# Altium PCB BLDC_Controller_PCB.PcbDoc
Units mm, origin at the board's own origin, x right, y up, seen from the top; angles counter-clockwise.
Board outline 152.4 x 101.6 mm, 2 copper layers (Top Layer, Bottom Layer); 112 components, 63 nets, 275 pads, 7 vias.
Unrouted connection lines stored in the file: 81.
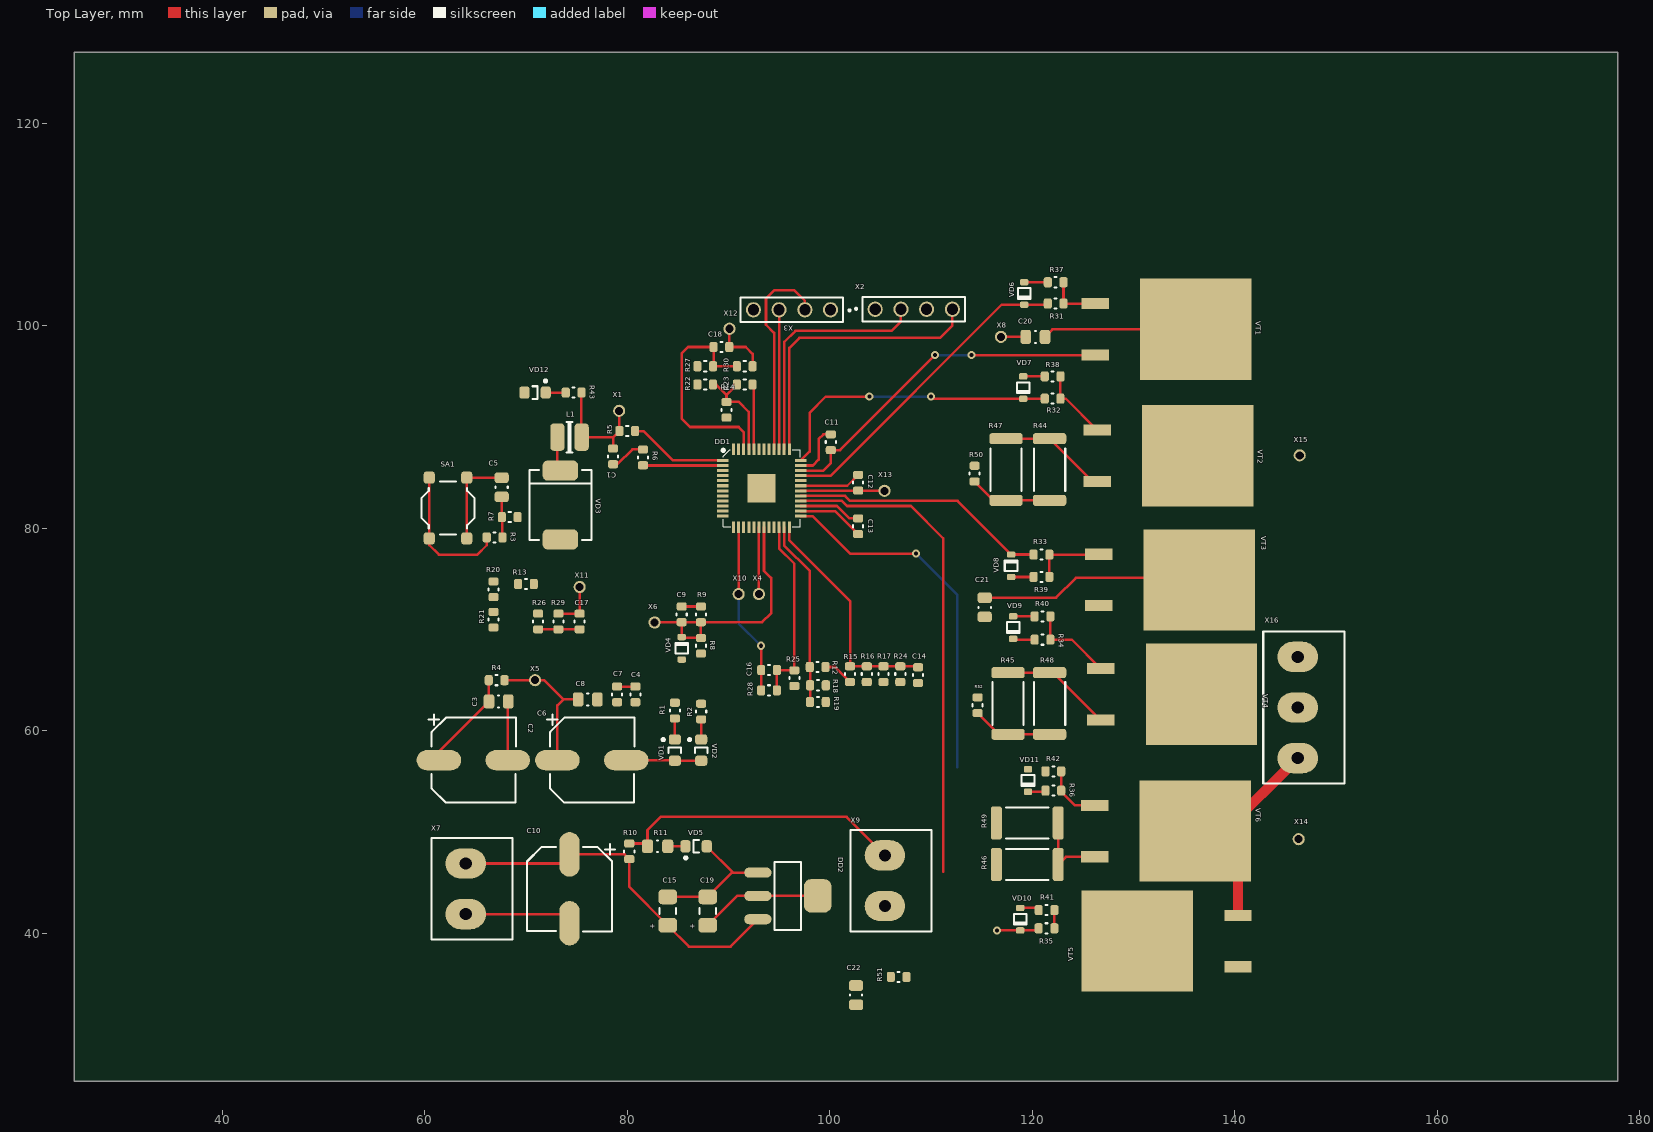
[diagram p0: Top Layer view]
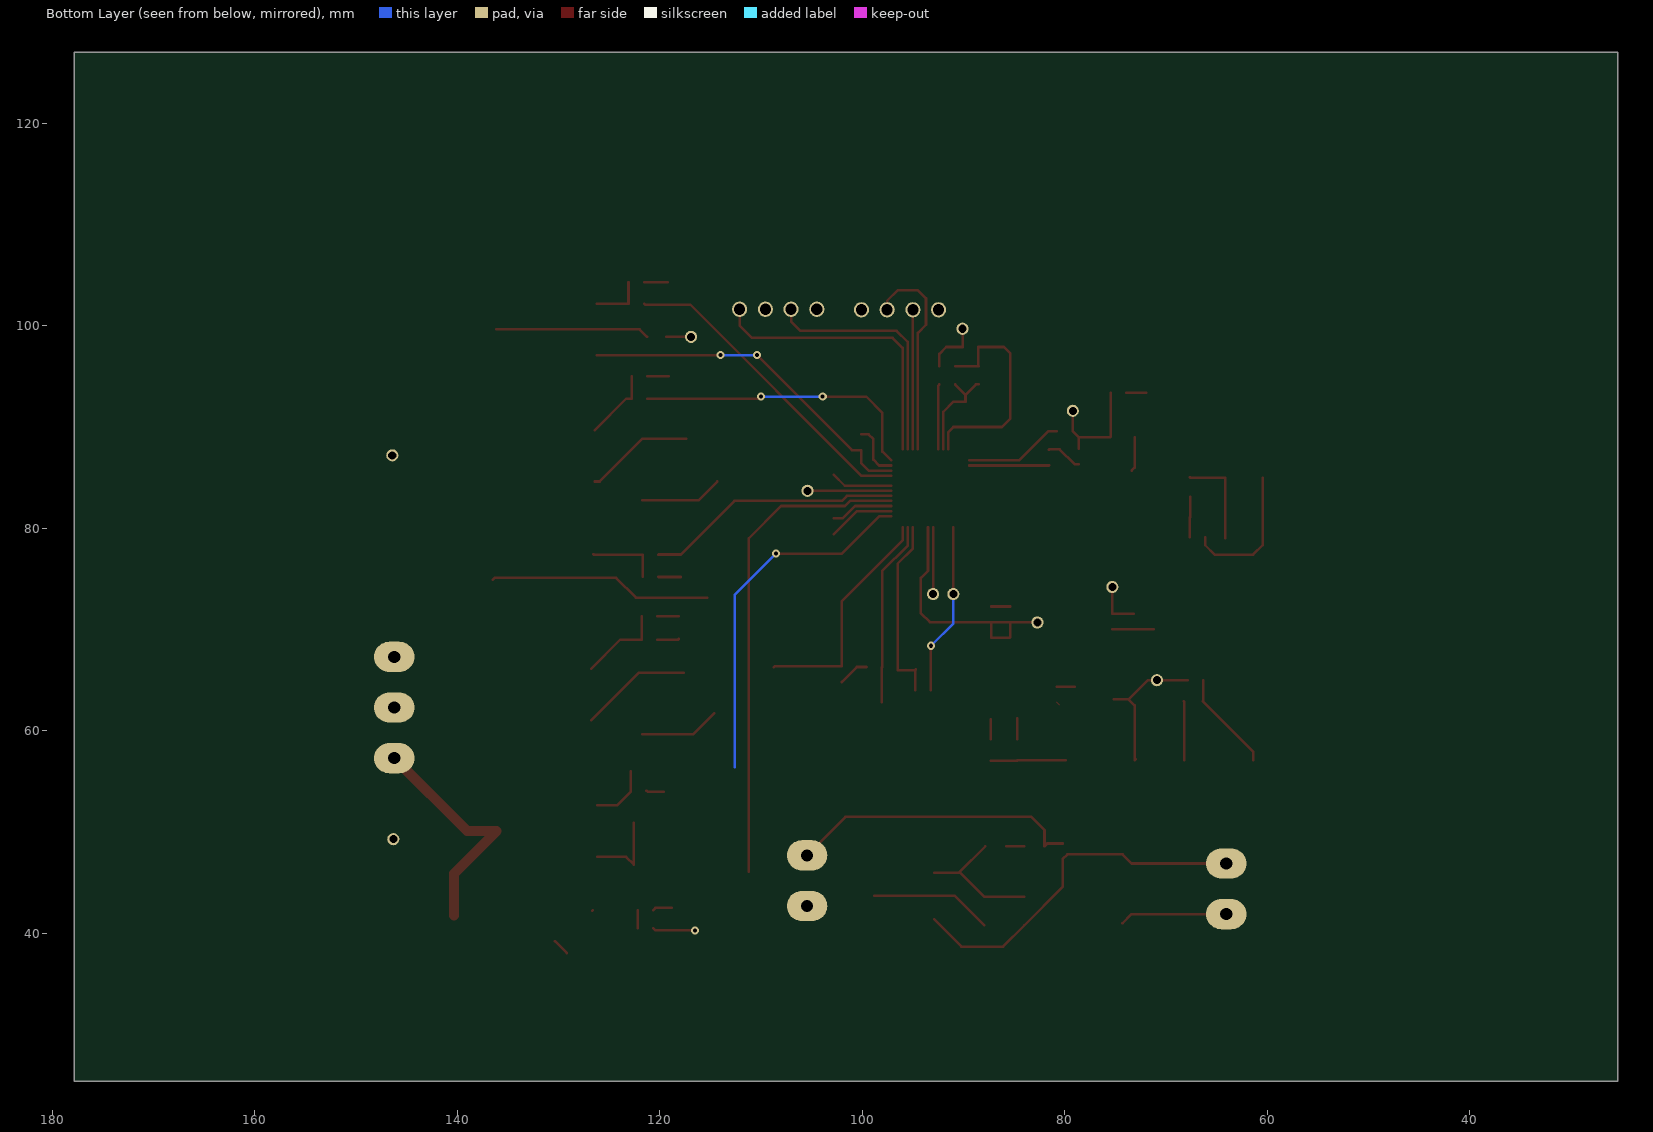
[diagram p1: Bottom Layer view, seen from below]

## Layer stack, top to bottom
Top Solder: solder mask 0.0102, Solder Resist, Dk 3.5
Top Layer: signal copper 0.0356
Dielectric 1: dielectric 0.32, FR-4, Dk 4.8
Bottom Layer: signal copper 0.0356
Bottom Solder: solder mask 0.0102, Solder Resist, Dk 3.5

## Board outline
25.4,25.4 177.8,25.4 177.8,127 25.4,127

## Design rules (kind name [scope] priority, off if disabled: settings)
Clearance [All] p1: gap=0 ignorepadtopadclearanceinfootprint=TRUE
PolygonConnect [All] p1: connectstyle=Relief reliefconductorwidth=0.254 reliefentries=4 polygonreliefangle="90 Angle" airgapwidth=0.254
RoutingVias [All] p1: holewidth=0.4 width=0.8 viastyle="Through Hole" minholewidth=0.4 minwidth=0.8 maxholewidth=0.4 maxwidth=0.8
SolderMaskExpansion [All] p1: expansion=0.102
Width [All] p1: maxlimit=1 minlimit=0.25 preferedwidth=0.26
30 further rules are at their usual default settings.

## Components (designator, comment, footprint, x,y, rotation, side; value= is the part's Value field where it differs from the comment)
C1 "Cap EIA 0603" "CAP EIA 0603" 78.6,87.1 r90 top value=47uF
C2 "Cap El SMT Case F" "CAP EL CASE F" 64.8,57.1 r90 top value=22uF
C3 "Cap EIA 0805" "CAP EIA 0805" 67.3,62.9 r180 top value=220nF
C4 "Cap EIA 0603" "CAP EIA 0603" 80.8,63.6 r90 top value=100nF
C5 "Cap EIA 0805" "CAP EIA 0805" 67.6,84.05 r270 top value=3.3nF
C6 "Cap El SMT Case F" "CAP EL CASE F" 76.5,57.1 r90 top value=10uF
C7 "Cap EIA 0603" "CAP EIA 0603" 79,63.6 r90 top value=100nF
C8 "Cap EIA 0805" "CAP EIA 0805" 76.1,63.1 r0 top value=100nF
C9 "Cap EIA 0603" "CAP EIA 0603" 85.375,71.5 r270 top
C10 "Cap El SMT Case F" "CAP EL CASE F" 74.3,44.4 r0 top value=220uF
C11 "Cap EIA 0603" "CAP EIA 0603" 100.1,88.5 r270 top value=100nF
C12 "Cap EIA 0603" "CAP EIA 0603" 102.8,84.5 r270 top value=100nF
C13 "Cap EIA 0603" "CAP EIA 0603" 102.8,80.2 r270 top value=100nF
C14 "Cap EIA 0603" "CAP EIA 0603" 108.717,65.5 r90 top value=1nF
C15 "Cap El Case A (Tantalum)" "CAP CASE A" 84,42.2 r90 top value=10uF
C16 "Cap EIA 0603" "CAP EIA 0603" 94,66 r180 top
C17 "Cap EIA 0603" "CAP EIA 0603" 75.3,70.8 r90 top
C18 "Cap EIA 0603" "CAP EIA 0603" 89.3,97.9 r0 top
C19 "Cap El Case A (Tantalum)" "CAP CASE A" 87.941,42.2 r90 top value=10uF
C20 "Cap EIA 0805" "CAP EIA 0805" 120.3,98.9 r0 top value=220nF
C21 "Cap EIA 0805" "CAP EIA 0805" 115.3,72.2 r90 top value=220nF
C22 "Cap EIA 0805" "CAP EIA 0805" 102.6,33.9 r90 top value=220nF
DD1 "STSPIN32F0" "VFQFPN48 7 x 7 x 1.0 - 48L" 93.35,83.7 r0 top value="Микросхема управления бесколлекторным эл.двиг."
DD2 "LM1117S50" SOT-223_M 95.85,43.7 r270 top value="Регулятор напряжения LDO 800mA"
L1 "22uH" SRN3015 74.3,89 r180 top value="Дроссель - Ток:  А; Ток насыщения:  А; Индуктивность:  мкГн; Допуск: ±%;"
R1 "Res EIA 0603" "RES EIA 0603" 84.7,62 r270 top value=120
R2 "Res EIA 0603" "RES EIA 0603" 87.3,61.9 r270 top value=120
R3 "Res EIA 0603" "RES EIA 0603" 66.9,79.1 r0 top value=100
R4 "Res EIA 0603" "RES EIA 0603" 67.1,65 r0 top value=0
R5 "Res EIA 0603" "RES EIA 0603" 80,89.6 r0 top value=0
R6 "Res EIA 0603" "RES EIA 0603" 81.554,87 r270 top value=0
R7 "Res EIA 0603" "RES EIA 0603" 68.4,81.1 r0 top value=39k
R8 "Res EIA 0603" "RES EIA 0603" 87.275,68.4 r270 top value=2.2k
R9 "Res EIA 0603" "RES EIA 0603" 87.275,71.5 r270 top value=2.2k
R10 "Res EIA 0603" "RES EIA 0603" 80.2,48.1 r90 top value=0
R11 "Res EIA 0805" "RES EIA 0805" 83,48.6 r180 top value=2.1k
R12 "Res EIA 0603" "RES EIA 0603" 98.8,66.3 r180 top value=1.78k
R13 "Res EIA 0603" "RES EIA 0603" 70,74.5 r180 top value=1.78k
R14 "Res EIA 0603" "RES EIA 0603" 89.8,91.7 r90 top value=1.78k
R15 "Res EIA 0603" "RES EIA 0603" 102,65.6 r90 top value=2.2k
R16 "Res EIA 0603" "RES EIA 0603" 103.654,65.6 r90 top value=2.2k
R17 "Res EIA 0603" "RES EIA 0603" 105.309,65.6 r90 top value=2.2k
R18 "Res EIA 0603" "RES EIA 0603" 98.829,64.5 r0 top value=27.4k
R19 "Res EIA 0603" "RES EIA 0603" 98.829,62.846 r180 top value=27.4k
R20 "Res EIA 0603" "RES EIA 0603" 66.8,73.975 r90 top value=27.4k
R21 "Res EIA 0603" "RES EIA 0603" 66.8,70.971 r90 top value=27.4k
R22 "Res EIA 0603" "RES EIA 0603" 87.7,94.2 r180 top value=27.4k
R23 "Res EIA 0603" "RES EIA 0603" 91.6,94.2 r180 top value=27.4k
R24 "Res EIA 0603" "RES EIA 0603" 106.963,65.6 r270 top value=75k
R25 "Res EIA 0603" "RES EIA 0603" 96.5,65.2 r90 top value=1.78k
R26 "Res EIA 0603" "RES EIA 0603" 71.2,70.8 r270 top value=1.78k
R27 "Res EIA 0603" "RES EIA 0603" 87.7,96 r0 top value=1.78k
R28 "Res EIA 0603" "RES EIA 0603" 94,64 r180 top value=13.7k
R29 "Res EIA 0603" "RES EIA 0603" 73.2,70.8 r90 top value=13.7k
R30 "Res EIA 0603" "RES EIA 0603" 91.6,96 r0 top value=13.7k
R31 "Res EIA 0603" "RES EIA 0603" 122.3,102.19 r0 top value=62
R32 "Res EIA 0603" "RES EIA 0603" 122,92.8 r0 top value=62
R33 "Res EIA 0603" "RES EIA 0603" 120.9,77.4 r0 top value=62
R34 "Res EIA 0603" "RES EIA 0603" 121,69 r0 top value=62
R35 "Res EIA 0603" "RES EIA 0603" 121.4,40.5 r0 top value=62
R36 "Res EIA 0603" "RES EIA 0603" 122.075,54.1 r0 top value=62
R37 "Res EIA 0603" "RES EIA 0603" 122.3,104.29 r0 top value=10
R38 "Res EIA 0603" "RES EIA 0603" 122,95 r0 top value=10
R39 "Res EIA 0603" "RES EIA 0603" 120.9,75.2 r0 top value=10
R40 "Res EIA 0603" "RES EIA 0603" 121,71.3 r0 top value=10
R41 "Res EIA 0603" "RES EIA 0603" 121.4,42.3 r0 top value=10
R42 "Res EIA 0603" "RES EIA 0603" 122.075,56 r0 top value=10
R43 "Res EIA 0603" "RES EIA 0603" 74.7,93.4 r180 top value=330
R44 "Res EIA 2512" "RES EIA 2512" 121.7,85.8 r90 top value=0.02
R45 "Res EIA 2512" "RES EIA 2512" 117.6,62.7 r90 top value=0.02
R46 "Res EIA 2512" "RES EIA 2512" 119.5,46.8 r0 top value=0.02
R47 "Res EIA 2512" "RES EIA 2512" 117.4,85.8 r270 top value=0.02
R48 "Res EIA 2512" "RES EIA 2512" 121.7,62.7 r270 top value=0.02
R49 "Res EIA 2512" "RES EIA 2512" 119.5,50.9 r180 top value=0.02
R50 "Res EIA 0603" "RES EIA 0603" 114.3,85.4 r270 top value=0
R51 "Res EIA 0603" "RES EIA 0603" 106.8,35.7 r0 top value=0
R52 "Res EIA 0603" "RES EIA 0603" 114.6,62.525 r270 top value=0
SA1 "IT-1187" IT-1187 62.3,82 r90 top value="Тактовые кнопки  4х4 мм. SMD h=1,5 мм."
VD1 "KP-2012xxxx" "SMD LED 0805 (GREEN)" 84.7,58.1 r270 top value="Светодиод общего назначения - Цвет: Красный; N: 1; ?1:  645 нм; Iv1: 80 мкд; U: 2.6 В;"
VD2 "KP-2012xxxx" "SMD LED 0805 (GREEN)" 87.3,58.1 r270 top value="Светодиод общего назначения - Цвет: Красный; N: 1; ?1:  645 нм; Iv1: 80 мкд; U: 2.6 В;"
VD3 "SMCJ5.0A" DO-214AB 73.4,82.3 r270 top value="TVS Диод, однонаправленный, Uраб. = 5В, Uпроб. = 6,74В, P = 1500 Вт"
VD4 "BAT54HT1G" SOD-323 85.375,68.146 r270 top value="SCHOTTKY BARRIER DIOD 0.2 AMPERES, 30 VOLTS"
VD5 "KP-2012xxxx" "SMD LED 0805 (GREEN)" 86.8,48.6 r0 top value="Светодиод общего назначения - Цвет: Красный; N: 1; ?1:  645 нм; Iv1: 80 мкд; U: 2.6 В;"
VD6 "4148WS" SOD-323 119.2,103.19 r90 top value="150mA, 100V, SOD-323"
VD7 "4148WS" SOD-323 119.1,93.89 r90 top value="150mA, 100V, SOD-323"
VD8 "4148WS" SOD-323 117.9,76.3 r270 top value="150mA, 100V, SOD-323"
VD9 "4148WS" SOD-323 118.1,70.2 r90 top value="150mA, 100V, SOD-323"
VD10 "4148WS" SOD-323 118.8,41.4 r90 top value="150mA, 100V, SOD-323"
VD11 "4148WS" SOD-323 119.575,55.1 r90 top value="150mA, 100V, SOD-323"
VD12 "KP-2012xxxx" "SMD LED 0805 (GREEN)" 70.9,93.4 r180 top value="Светодиод общего назначения - Цвет: Красный; N: 1; ?1:  645 нм; Iv1: 80 мкд; U: 2.6 В;"
VT1 "IRLZ44NS" D2PAK_M 133.05,99.64 r0 top value="MOSFET силовой транзистор - Тип: N; Uси: 50 В; Rси(вкл): 0.35...0.25 Ом; Iси: 40А;"
VT2 "IRLZ44NS" D2PAK_M 133.25,87.16 r0 top value="MOSFET силовой транзистор - Тип: N; Uси: 50 В; Rси(вкл): 0.35...0.25 Ом; Iси: 40А;"
VT3 "IRLZ44NS" D2PAK_M 133.4,74.9 r0 top value="MOSFET силовой транзистор - Тип: N; Uси: 50 В; Rси(вкл): 0.35...0.25 Ом; Iси: 40А;"
VT4 "IRLZ44NS" D2PAK_M 133.6,63.6 r0 top value="MOSFET силовой транзистор - Тип: N; Uси: 50 В; Rси(вкл): 0.35...0.25 Ом; Iси: 40А;"
VT5 "IRLZ44NS" D2PAK_M 133.45,39.24 r180 top value="MOSFET силовой транзистор - Тип: N; Uси: 50 В; Rси(вкл): 0.35...0.25 Ом; Iси: 40А;"
VT6 "IRLZ44NS" D2PAK_M 133,50.1 r0 top value="MOSFET силовой транзистор - Тип: N; Uси: 50 В; Rси(вкл): 0.35...0.25 Ом; Iси: 40А;"
X1 "Pin" Pin 79.2,91.6 r90 top value="Generic Pin Contact"
X2 "ST-Link" SWD 108.257,101.6 r0 top value="Вилка штыревая 2.54мм 1x4 прям"
X3 "PLS-4" SWD 96.3,101.6 r180 top value="Разъем штыревой четырехконтактный"
X4 "Pin" Pin 93,73.5 r90 top value="Generic Pin Contact"
X5 "Pin" Pin 70.9,65 r90 top value="Generic Pin Contact"
X6 "Pin" Pin 82.7,70.7 r270 top value="Generic Pin Contact"
X7 "TB2" TB2 63.9,44.4 r90 top
X8 "Pin" Pin 116.9,98.9 r90 top value="Generic Pin Contact"
X9 "TB2" TB2 105.3,45.2 r90 top
X10 "Pin" Pin 91,73.5 r90 top value="Generic Pin Contact"
X11 "Pin" Pin 75.3,74.2 r90 top value="Generic Pin Contact"
X12 "Pin" Pin 90.1,99.7 r90 top value="Generic Pin Contact"
X13 "Pin" Pin 105.4,83.7 r90 top value="Generic Pin Contact"
X14 "Pin" Pin 146.3,49.3 r90 top value="Generic Pin Contact"
X15 "Pin" Pin 146.4,87.2 r90 top value="Generic Pin Contact"
X16 "TB3" TB3 146.05,59.8 r90 top

## Footprints (in the part's own frame and the unit in brackets; to place one, negate y for a bottom-side part, rotate by r counter-clockwise, add the part's x,y. Pads: shape width x height; smd on the part's side, far side on the other; paste and mask are expansions set on the pad)
"CAP CASE A" [mm] "Chip Capacitor, 2-Leads, Body 3.20x1.60mm, IPC Medium Density"
  rrect50% 1.45x1.85 smd: 1(-1.4,0) 2(1.4,0)
  silkscreen extent -0.3,-0.82 0.3,0.83, body extent -1.7,-0.8 1.7,0.8, height 1.64
"CAP EIA 0603" [mm] "Chip Resistor, 2-Leads, Body 1.57x0.85mm, IPC Medium Density"
  rrect50% 0.8x1 smd: 1(-0.775,0) 2(0.775,0)
  silkscreen extent -0.1,-0.5 0.1,0.5, body extent -0.8,-0.4 0.8,0.4, height 0.3
"CAP EIA 0805" [mm] "Chip Capacitor, 2-Leads, Body 2.00x1.25mm, IPC Medium Density"
  rrect50% 1.05x1.4 smd: 1(-0.95,0) 2(0.95,0)
  silkscreen extent -0.05,-0.6 0.05,0.6, body extent -1,-0.62 1,0.62, height 0.78
"CAP EL CASE F" [mm] "SMT Type 8.0x10.5 mm"
  oval 2x4.4 smd: 1(0,3.4) 2(0,-3.4)
  silkscreen extent -4.2,-4.2 4.5,4.4, body extent -4.15,-4.95 4.15,4.95, height 10.2
D2PAK_M [mm] "D2-PAK, 4-Leads, Body 8.8x10.4mm, Pitch 2.54mm, Lead Span 15.1mm, IPC Low Density"
  rect 2.7x1.1 smd: 1(-6.85,2.54) 3(-6.85,-2.54)
  rect 11x10 smd: 2(3.1,0)
  body extent -7.72,-5.08 7.55,5.08, height 4.98
DO-214AB [mm] "SMT Diod DO-214AB case (SMC)"
  rrect50% 2x3.5 smd: 1(-3.4,0) 2(3.4,0)
  silkscreen extent -3.45,-3.05 3.45,3.05, body extent -4.06,-3.05 4.07,3.05, height 2.4
IT-1187 [mm]
  rrect50% 1.2x1.1 smd: 1(-3,-1.85) 1(3,-1.85) 2(-3,1.85) 2(3,1.85)
  silkscreen extent -2.6,-2.6 2.6,2.6, body extent -3.2,-2.6 3.2,2.6, height 1.5
Pin [mm]
  round 1.2 hole 0.8: 1(0,0)
"RES EIA 0603" [mm] "Chip Resistor, 2-Leads, Body 1.57x0.85mm, IPC Medium Density"
  rrect50% 0.8x1 smd: 1(-0.775,0) 2(0.775,0)
  silkscreen extent -0.1,-0.5 0.1,0.5, body extent -0.8,-0.4 0.8,0.4, height 0.3
"RES EIA 0805" [mm] "Chip Resistor, 2-Leads, Body 2.10x1.30mm, IPC Medium Density"
  rrect50% 1.1x1.35 smd: 1(-1,0) 2(1,0)
  silkscreen extent -0.05,-0.58 0.05,0.58, body extent -1,-0.62 1,0.62, height 0.78
"RES EIA 2512" [mm] "Chip Resistor, 2-Leads, Body 6.35x3.10mm, IPC Medium Density"
  rrect50% 1.1x3.3 smd: 1(-3.05,0) 2(3.05,0)
  silkscreen extent -2.1,-1.55 2.1,1.55, body extent -3.18,-1.5 3.18,1.5, height 1.6
"SMD LED 0805 (GREEN)" [mm]
  rrect50% 1x1.2 smd: 1(-1.05,0) 2(1.05,0)
  silkscreen extent -1.15,-1.27 0.28,0.63, body extent -1.01,-0.62 1.01,0.63, height 1.1
SOD-323 [mm] "Diod"
  rrect50% 0.63x0.83 smd: 1(-1.11,0) 2(1.11,0)
  silkscreen extent -0.53,-0.63 0.52,0.63, body extent -1.3,-0.67 1.3,0.68, height 1.1
SOT-223_M [mm] "SOT223, 4-Leads, Body 6.5x3.5mm, Pitch 2.3mm, Lead Span 7mm, IPC Low Density"
  oval 1x2.7 smd: 1(-2.3,-2.95) 2(0,-2.95) 3(2.3,-2.95)
  rrect50% 3.3x2.7 smd: 4(0,2.95)
  silkscreen extent -3.35,-1.3 3.35,1.3, body extent -3.25,-3.49 3.25,3.4, height 1.7
SRN3015 [mm] "SRN3015 Series - Semi-shielded Power Inductors"
  rrect50% 1.4x2.7 smd: 1(-1.2,0) 2(1.2,0)
  silkscreen extent -0.3,-1.5 0.3,1.5, body extent -1.51,-1.36 1.51,1.36, height 1.5
SWD [mm]
  round 1.5 hole 1.1: 1(-3.775,0.025) 2(-1.235,0.025) 3(1.305,0.025) 4(3.845,0.025)
  silkscreen extent -5.75,-1.2 5.1,1.25, body extent -5.11,-1.2 5.04,1.34, height 8.54
TB2 [mm]
  oval 3x4 hole 1.2: 1(2.5,-0.15) 2(-2.5,-0.15)
  silkscreen extent -5,-4.75 5,3.25, body extent -5,-4.75 5,3.25, height 10
TB3 [mm]
  oval 3x4 hole 1.2: 1(7.5,-0.15) 2(2.5,-0.15) 3(-2.5,-0.15)
  silkscreen extent -5,-4.75 10,3.25, body extent -5,-4.75 10,3.25, height 10
"VFQFPN48 7 x 7 x 1.0 - 48L" [mm]
  rect 1.1x0.3 smd: 1(-3.925,3) 2(-3.925,2.5) 3(-3.925,2) 4(-3.925,1.5) 5(-3.925,1) 6(-3.925,0.5) 7(-3.925,0) 8(-3.925,-0.5) 9(-3.925,-1) 10(-3.925,-1.5) 11(-3.925,-2) 12(-3.925,-2.5) 25(3.775,-2.5) 26(3.775,-2) 27(3.775,-1.5) 28(3.775,-1) 29(3.775,-0.5) 30(3.775,0) 31(3.775,0.5) 32(3.775,1) 33(3.775,1.5) 34(3.775,2) 35(3.775,2.5) 36(3.775,3)
  rect 0.3x1.1 smd: 13(-2.85,-3.6) 14(-2.35,-3.6) 15(-1.85,-3.6) 16(-1.35,-3.6) 17(-0.85,-3.6) 18(-0.35,-3.6) 19(0.15,-3.6) 20(0.65,-3.6) 21(1.15,-3.6) 22(1.65,-3.6) 23(2.15,-3.6) 24(2.65,-3.6) 37(2.65,4.1) 38(2.15,4.1) 39(1.65,4.1) 40(1.15,4.1) 41(0.65,4.1) 42(0.15,4.1) 43(-0.35,4.1) 44(-0.85,4.1) 45(-1.35,4.1) 46(-1.85,4.1) 47(-2.35,4.1) 48(-2.85,4.1)
  rect 2.8x2.8 smd: 49(-0.1,0.25)
  silkscreen extent -4,-3.55 3.72,4.12, body extent -4.08,-3.72 3.88,4.23, height 0.75

## Part data
C2 C6 C10: "8.0x10.5 mm Surface Mount Aluminum Electrolytic Capacitor", Group=Конденсаторы
DD1: "Микросхема управления бесколлекторным эл.двигателем", Manufacture=ST, Group=Микросхемы, Information=https://www.st.com/resource/en/datasheet/stspin32f0.pdf, Name=STSPIN32F0, Supplier="Магазин: hkhonbo Store"
DD2: "LDO Voltage Regulator", Manufacturer="ST Microelectronics", Group=Микросхемы, Name=LM1117S50, Supplier="ООО \"Торгэлектроника\""
L1: library part SRN3015, "Semi-shielded Power Inductors", Manufacturer=Bourns, Group=Индуктивности, Name=SRN3015-xxxx, Supplier=Компэл
SA1: "Тактовая кнопка", Manufacturer="Switronic Industrial Corp.", Group=Переключатели, Name=IT-1187, Supplier="ООО\"Торгэлектроника\""
VD1 VD2 VD5 VD12: library part FYLS-0805xxxx, "SMD Led", Manufacture="Foryard (FORYARD)", Group=Диоды, Name=KP-2012xxxx, Supplier="ООО \"Компэл\""
VD3: "TVS Диод, двунаправленный, Uраб. = 5В, Uпроб. = 6,74В, P = 1500 Вт", Manufacture="ST Microelectronics (ST)", Group=Диоды, Name=SMCJ5.0A, Supplier="ООО \"Компэл\""
VD4: "SCHOTTKY BARRIER DIOD 0.2 AMPERES, 30 VOLTS", Manufacture="ON Semiconductor", Group=Диоды, Name=BAT54HT1G, Supplier="ООО \"Компэл\""
VD6 VD7 VD8 VD9 VD10 VD11: "Diod, 150mA, 100V(SOD-323)", Manufacture="Diodes Incorporated", Group=Диоды, Name=1N4148WS, Supplier="Магазин: CHANZON Official Store"
VT1 VT2 VT3 VT4 VT5 VT6: "HEXFET Power MOSFET", Manufacturer="International Rectifier", Group=Транзисторы, Name=IRLZ44NSPBF, Supplier="ООО \"Торгэлектроника\""
X1 X4 X5 X6 X8 X10 X11 X12 X13 X14 X15: "Generic Pin Contact", Manufacturer=-, Group=-, Name=-, Supplier=-
X2: library part "SWD(PLS- 4)", Manufacturer=Тайвань(Китай), Group=Разъемы, Name="PLS- 4", Supplier="ООО\"Торгэлектроника\""
X3: Manufacturer="Hsuan Mao(Китай)", Group=Разъемы, Name=PLS-4, Supplier="ООО\"Торгэлектроника\""
C1 C3 C4 C5 C7 C8 C9 C11 C12 C13 C14 C15 C16 C17 C18 C19 C20 C21 C22: Group=Конденсаторы
R1 R2 R3 R4 R5 R6 R7 R8 R9 R10 R11 R12 R13 R14 R15 R16 R17 R18 R19 R20 R21 R22 R23 R24 R25 R26 R27 R28 R29 R30 R31 R32 R33 R34 R35 R36 R37 R38 R39 R40 R41 R42 R43 R44 R45 R46 R47 R48 R49 R50 R51 R52: Group=Резисторы
X7 X9 X16: Group=Разъемы

## Via types
v1: diameter 0.8, hole 0.4, Top Layer to Bottom Layer, 7 vias

## Nets (pads, with @x,y where several pads share a name; then routed paths per layer and width w, separated by ;. In a path a pad name is that pad's centre, name@x,y a point inside that pad or via, vN(x,y) a via of type N, cw(c..) or ccw(c..) an arc to the next point about the centre after c; other vN are vias at no path point)
GND: C1.1 C2.2 C3.1 C4.1 C5.1 C6.2 C7.1 C8.2 C9.1 C10.2 C14.1 C15.2 C19.2 C20.1 C21.1 C22.1 DD1.20 DD1.44 DD1.49 DD2.1 R6.1 R9.1 R19.1 R21.1 R23.1 R44.1 R45.1 R46.1 R47.2 R48.2 R49.2 R50.2 R51.2 R52.2 SA1.1 VD1.2 VD2.2 VD3.2 VD5.2 VD12.2 X2.3 X3.4 X7.2 X8.1 X9.2 | length 77.9
  Top Layer w0: C4.1@80.5,62.525 C4.1
  Top Layer w0.254: X7.2 73.4,41.9 C10.2 ; SA1.1@64.15,79 64.15,85 C5.1 C5.1@67.65,85.05 ; C2.2 68.2,62.85 C3.1 ; C1.1 79.025,86.325 80.5,87.8 81.529,87.8 R6.1 ; C6.2 84.65,57.1 VD1.2 VD2.2 ; C15.2 C19.2 90.341,46 90.45,46 ; C9.1 R9.1 ; VD5.2 90.45,46 ; R23.1 92.5,94.075 DD1.44 ; DD2.1 90.45,46 ; R50.2 116.175,82.75 R47.2 R44.1 ; R52.2 116.7,59.65 R45.1 R48.2 ; X8.1 C20.1
HSU: DD1.33 R31.1 VD6.1 | length 31.4
  Top Layer w0.25: DD1.33 100.1,85.2 116.98,102.08 VD6.1
  Top Layer w0.254: VD6.1 121.415,102.08 R31.1
HSV: DD1.29 R33.1 VD8.1 | length 25.4
  Top Layer w0.25: DD1.29 101.5,83.2 102,82.7 112.61,82.7 VD8.1
  Top Layer w0.254: VD8.1 120.115,77.41 R33.1
HSW: DD1.25 R35.1 VD10.1 | length 39.9
  Top Layer w0.25: DD1.25 98.3,81.2 102,77.5 v1(108.5,77.5) ; v1(116.5,40.3) 118.79,40.3 VD10.1 120.415,40.29 R35.1
  Bottom Layer w0.25: v1(108.5,77.5) 112.6,73.4 112.6,56.4
LSU: DD1.36 R32.1 VD7.1 | length 29
  Top Layer w0.25: DD1.36 98,87.575 98,91.4 99.6,93 v1(103.9,93) ; v1(110,93) 110.22,92.78 VD7.1 121.205,92.78 R32.1
  Bottom Layer w0.25: v1(103.9,93) v1(110,93)
LSV: DD1.32 R34.1 VD9.1 | length 2.2
  Top Layer w0.254: VD9.1 118.19,69 R34.1
LSW: DD1.28 R36.1 VD11.1 | length 50.3
  Top Layer w0.25: DD1.28 101.2,82.7 101.7,82.2 108,82.2 111.2,79 111.2,46.1
  Top Layer w0.254: VD11.1 121.19,53.99 R36.1
NetDD1_9: DD1.9 L1.2 VD3.1 | length 3.4
  Top Layer w0.254: L1.2 73.1,86 VD3.1
NetDD1_18: DD1.18 X4.1 | length 6.6
  Top Layer w0.25: X4.1 DD1.18
NetR1_2: R1.2 VD1.1 | length 2.1
  Top Layer w0.254: VD1.1 R1.2
NetR2_2: R2.2 VD2.1 | length 2
  Top Layer w0.254: VD2.1 R2.2
NetR3_1: R3.1 SA1.2 | length 13.9
  Top Layer w0.25: SA1.2@60.45,85 60.45,79 60.45,78.35 61.4,77.4 65.2,77.4 66.125,78.325 R3.1
NetR10_2: R10.2 R11.2 X9.1 | length 29.1
  Top Layer w0.254: R10.2 81.725,48.875 R11.2 82,50.2 83.3,51.5 101.65,51.5 X9.1
NetR11_1: R11.1 VD5.1 | length 1.7
  Top Layer w0.254: R11.1 VD5.1
NetR31_2: R31.2 R37.2 VT1.1 | length 5.2
  Top Layer w0.254: R37.2 R31.2 126.19,102.19 VT1.1
NetR32_2: R32.2 R38.2 VT2.1 | length 7.1
  Top Layer w0.254: R38.2 R32.2 123.3,92.8 VT2.1
NetR33_2: R33.2 R39.2 VT3.1 | length 7.1
  Top Layer w0.254: R39.2 R33.2 126.51,77.4 VT3.1
NetR34_2: R34.2 R40.2 VT4.1 | length 8.5
  Top Layer w0.254: R40.2 R34.2 123.89,69 VT4.1
NetR35_2: R35.2 R41.2 VT5.1 | length 1.9
  Top Layer w0.25: R35.2 R41.2 ; 126.59,42.3 126.65,42.24
NetR36_2: R36.2 R42.2 VT6.1 | length 5.9
  Top Layer w0.254: R42.2 R36.2 122.85,54.015 124.225,52.64 VT6.1
NetR37_1: R37.1 VD6.2 | length 2.3
  Top Layer w0.254: VD6.2 121.515,104.3 R37.1
NetR38_1: R38.1 VD7.2 | length 2.1
  Top Layer w0.254: VD7.2 R38.1
NetR39_1: R39.1 VD8.2 | length 2.2
  Top Layer w0.254: VD8.2 120.115,75.19 R39.1
NetR40_1: R40.1 VD9.2 | length 2.1
  Top Layer w0.254: VD9.2 120.215,71.31 R40.1
NetR41_1: R41.1 VD10.2 | length 1.9
  Top Layer w0.25: VD10.2 120.415,42.51 R41.1
NetR42_1: R42.1 VD11.2
NetR43_2: R43.2 VD12.1 | length 2
  Top Layer w0.25: VD12.1 R43.2
NRST: C5.2 DD1.7 R3.2 R7.1 | length 4
  Top Layer w0.254: C5.2 67.6,81.125 R7.1 67.675,81.05 R3.2
OCCOMP: C14.2 DD1.24 R15.2 R16.2 R17.2 R24.1 | length 23
  Top Layer w0.25: DD1.24 96,78.8 102,72.8 R15.2 R16.2 R17.2 R24.1 108.617,66.375 C14.2
OP1N: C16.1 DD1.22 R25.2 R28.1 | length 18.6
  Top Layer w0.25: DD1.22 95,78 96.5,76.5 R25.2
  Top Layer w0.254: C16.1@94.7,66.075 C16.1 ; R28.1 C16.1 ; R25.2 94.8,65.975 C16.1
OP1O: C16.2 DD1.14 DD1.21 R28.2 X10.1 | length 17
  Top Layer w0.25: X10.1 DD1.14 ; v1(93.2,68.4) 93.225,68.375 C16.2
  Top Layer w0.254: R28.2 C16.2
  Bottom Layer w0.25: X10.1 91,70.6 v1(93.2,68.4)
OP1P: DD1.23 R12.2 R18.1 R19.2 | length 18.3
  Top Layer w0.254: DD1.23 95.5,78.3 98.025,75.775 R12.2 98.054,66.271 R18.1 R19.2
OP2N: C17.1 DD1.42 R26.2 R29.1 | length 4.1
  Top Layer w0.25: R26.2 R29.1 C17.1
OP2O: C17.2 DD1.15 DD1.43 R29.2 X11.1 | length 4.7
  Top Layer w0.25: R29.2 C17.2 X11.1
OP2P: DD1.41 R13.2 R20.1 R21.2
OP3N: C18.1 DD1.46 R27.2 R30.1 | length 22.5
  Top Layer w0.25: R30.1 R27.2 88.525,96.05 C18.1 86,97.9 85.4,97.3 85.4,90.8 86.2,90 91,90 91.5,89.5 DD1.46
OP3O: C18.2 DD1.16 DD1.47 R30.2 X12.1 | length 5.6
  Top Layer w0.25: X12.1 90.075,99.675 C18.2 91.7,97.9 92.375,97.225 R30.2
OP3P: DD1.45 R14.2 R22.1 R23.2 | length 10.2
  Top Layer w0.25: R22.1 88.775,94.2 89.8,93.175 ; R23.2 89.8,93.175 ; DD1.45 92,91.5 91.025,92.475 R14.2 89.8,93.175
OP4N: DD1.2 R6.2 | length 7.9
  Top Layer w0.25: R6.2 81.579,86.2 DD1.2
OP4P: DD1.1 R5.2 | length 9.9
  Top Layer w0.25: R5.2 81.6,89.6 84.5,86.7 DD1.1
OUTU: C11.2 DD1.34 VT1.3 VT2.2 X15.1 X16.1 | length 34.6
  Top Layer w0.25: DD1.34 99.375,85.7 100.1,86.425 C11.2 101.025,87.725 v1(110.4,97.1) ; v1(114,97.1) VT1.3
  Bottom Layer w0.25: v1(110.4,97.1) v1(114,97.1)
OUTV: C12.2 DD1.30 VT3.3 VT4.2 X13.1 X16.2 | length 8.3
  Top Layer w0.25: DD1.30 102.775,83.7 C12.2 105.375,83.725 X13.1
OUTW: C13.2 DD1.26 VT5.3 VT6.2 X14.1 X16.3 | length 29.8
  Top Layer w0.25: DD1.26 100.525,81.7 C13.2
  Top Layer w1: VT5.3 140.3,45.9 VT6.2 139,50.1 X16.3
PA13: DD1.37 X2.4 | length 28.6
  Top Layer w0.25: DD1.37 96,97.8 97,98.8 110.9,98.8 112.102,100.002 X2.4
PA14: DD1.38 X2.2 | length 24.2
  Top Layer w0.25: DD1.38 95.5,98.4 96.6,99.5 106.1,99.5 107.022,100.422 X2.2
PB1: C9.2 DD1.19 R8.1 R9.2 VD4.1 X6.1 | length 25.6
  Top Layer w0.254: X6.1 82.725,70.725 C9.2 ; DD1.19 93.5,75.8 94.2,75.1 94.2,71.6 93.325,70.725 R9.2 ; C9.2 VD4.1 85.456,69.175 R8.1 R9.2 ; C9.2 R9.2
PB6: DD1.39 X3.3 | length 13.8
  Top Layer w0.25: X3.3 95,101.57 DD1.39
PB7: DD1.40 X3.2 | length 20.7
  Top Layer w0.25: DD1.40 94.5,99.3 93.7,100.1 93.7,102.7 94.5,103.5 96.5,103.5 97.535,102.465 X3.2
PF0: DD1.4 R2.1
PF1: DD1.5 R1.1
SENSE1N: R25.1 R52.1
SENSE1P: R12.1 R15.1 R46.2 R49.1 VT6.3 | length 11.1
  Top Layer w0.254: R12.1 100.525,66.3 R15.1 ; R49.1 R46.2 123.31,47.56 VT6.3
SENSE2N: R26.1 R51.1
SENSE2P: R13.1 R16.1 R45.2 R48.1 VT4.3 | length 11.1
  Top Layer w0.25: R48.1 122.06,65.75 VT4.3
  Top Layer w0.254: R45.2 R48.1
SENSE3N: R27.1 R50.1
SENSE3P: R14.1 R17.1 R44.2 R47.1 VT2.3 | length 10.8
  Top Layer w0.25: R44.2 125.93,84.62 VT2.3
  Top Layer w0.254: R47.1 R44.2
VBOOTU: C11.1 DD1.35 | length 5.4
  Top Layer w0.25: DD1.35 98.325,86.2 98.9,86.775 98.9,88.8 99.375,89.275 C11.1
VBOOTV: C12.1 DD1.31 | length 6.1
  Top Layer w0.25: DD1.31 101.725,84.2 C12.1
VBOOTW: C13.1 DD1.27 | length 6.2
  Top Layer w0.25: DD1.27 100.7,82.2 101.925,80.975 C13.1
VBUS: C10.1 C15.1 C20.2 C21.2 C22.2 DD2.3 R8.2 R10.1 VT1.2 VT3.2 VT5.2 X7.1 | length 74.7
  Top Layer w0.254: X7.1 73.4,46.9 C10.1 79.725,47.8 R10.1 80.2,44.6 C15.1 86.1,38.7 90.2,38.7 DD2.3 ; C21.2 122.35,73.15 124.3,75.1 136.3,75.1 VT3.2 ; C20.2 121.99,99.64 VT1.2 ; VT5.2@129.16,38.05 VT5.2
VDD: C1.2 C4.2 C7.2 C19.1 DD1.10 DD1.48 DD2.2 DD2.4 L1.1 R5.1 R7.2 R18.2 R20.2 R22.2 R24.2 R43.1 VD4.2 X1.1 X2.1 | length 25.4
  Top Layer w0.25: R43.1 75.475,89.025 L1.1 78.575,89 78.6,88.975 ; C1.2 78.6,88.975 ; C7.2 C4.2 ; X1.1 79.2,89.625 R5.1 78.6,88.975
  Top Layer w0.254: C19.1 90.841,43.7 DD2.2 DD2.4
VM: C2.1 C3.2 DD1.8 R4.1 | length 10
  Top Layer w0.254: C2.1 61.4,57.95 C3.2 66.325,62.925 R4.1
VREG: C6.1 C8.1 DD1.6 R4.2 X5.1 | length 14.5
  Top Layer w0.254: R4.2 71.8,65 73.7,63.1 ; C6.1@73,57.2 C6.1 73.1,62.5 73.7,63.1 ; C8.1 73.7,63.1
pads on no net: DD1.3 DD1.11 DD1.12 DD1.13 DD1.17 X3.1

## Silkscreen, mask and mechanical layers (free items; w line width, h text height)
Mechanical 1:
  lines w0.1: 151.1,29.7 151.1,107.2 ; 151.1,29.7 151.1,107.2 ; 151.1,29.7 151.1,107.2 ; 151.1,29.7 148.1,26.7 52.7,26.7 52.2,27.2 52.2,106.1 54.9,108.8 149.5,108.8 151.1,107.2 ; 151.1,107.2 151.1,94.8 151.1,107.2

## Text inside footprints (layer, text, board x,y; h text height)
C15: Top Overlay "+" at 82.7,40.4 h0.5 r90
C19: Top Overlay "+" at 86.641,40.4 h0.5 r90